# Altium PCB Backup_Supercap.PcbDoc
Units mil, origin at the board's own origin, x right, y up, seen from the top; angles counter-clockwise.
Board outline 2559.06 x 3740.16 mil, 2 copper layers (Top Layer, Bottom Layer); 49 components, 24 nets, 131 pads, 36 vias.
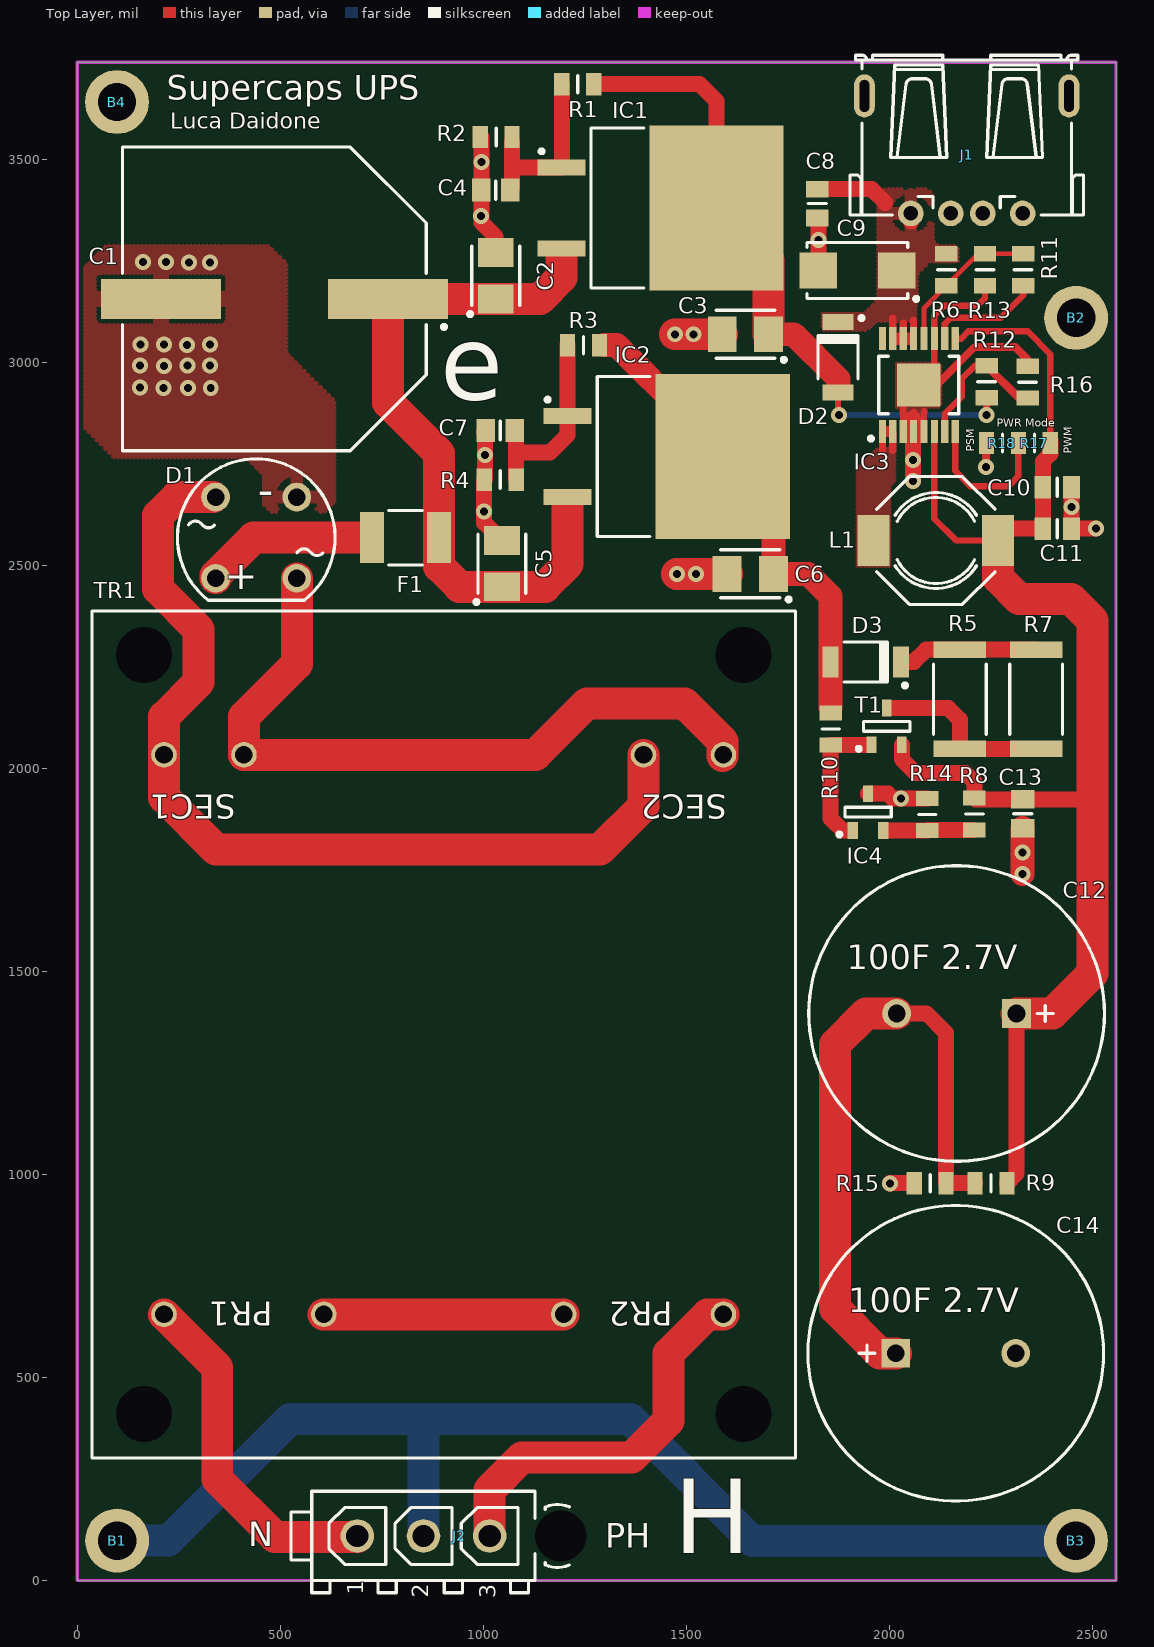
[diagram p0: Top Layer view]
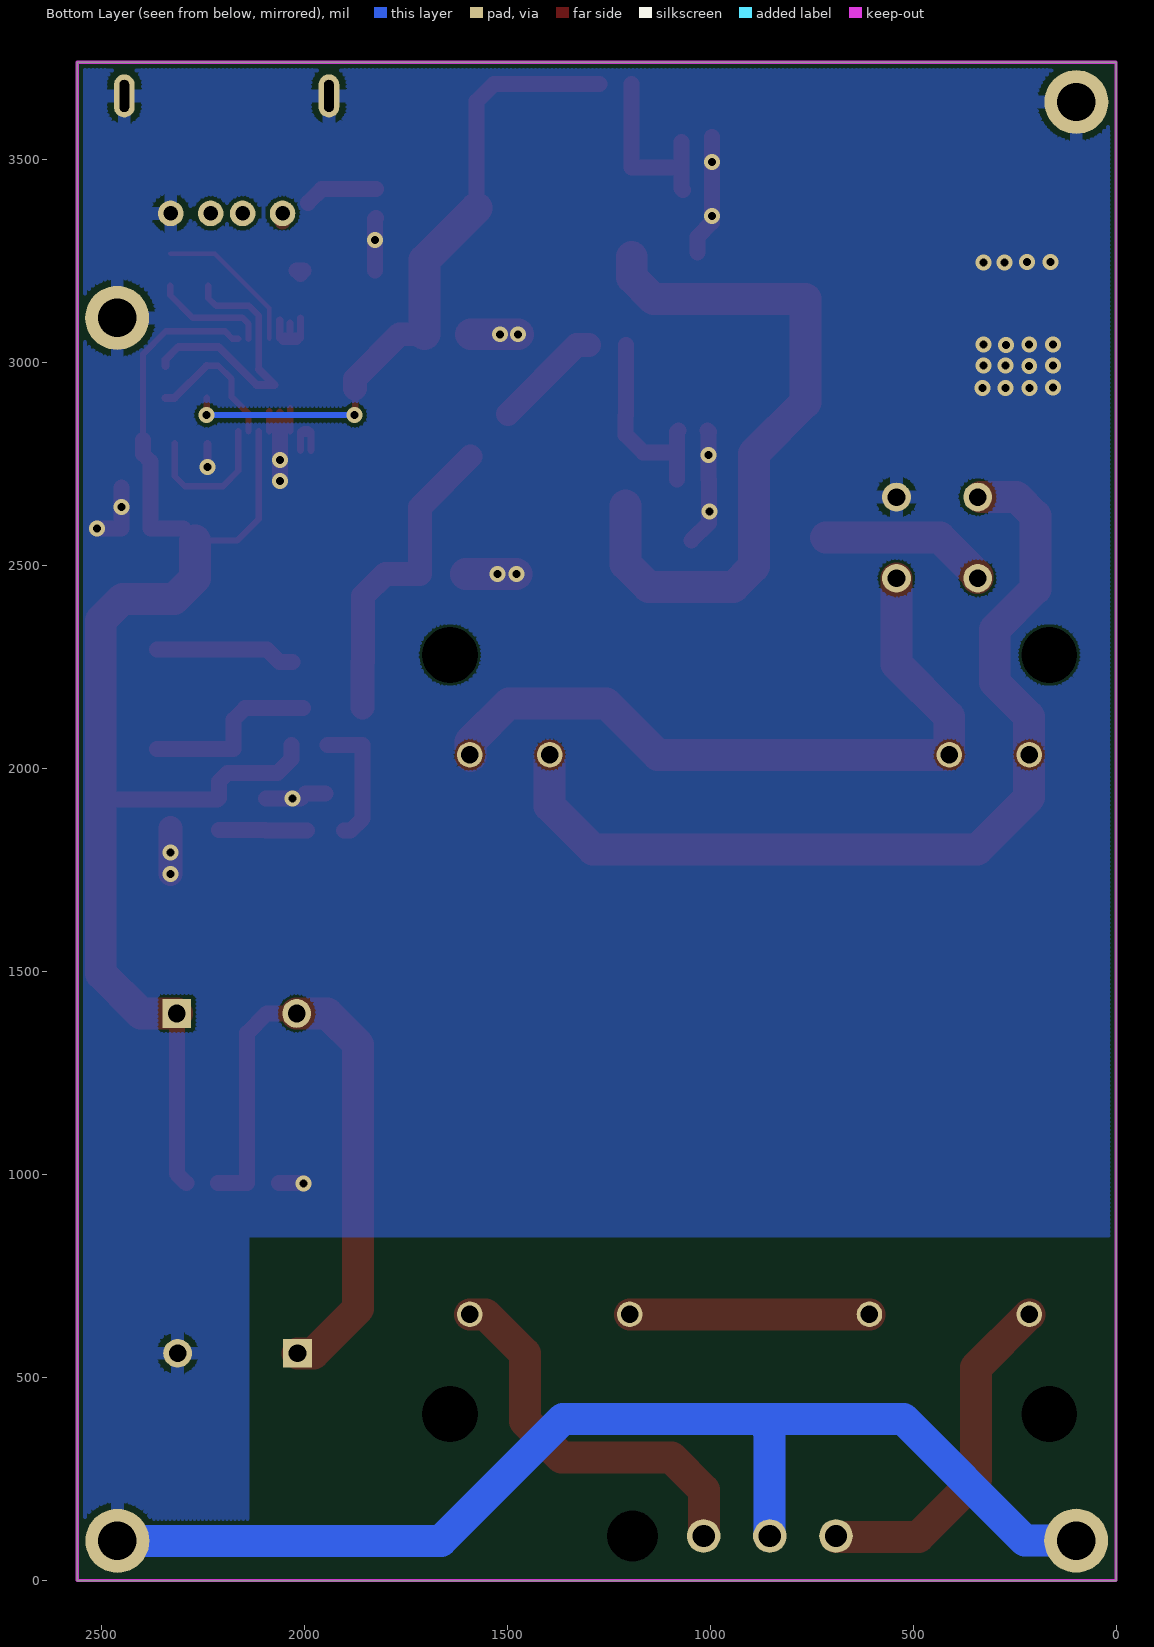
[diagram p1: Bottom Layer view, seen from below]
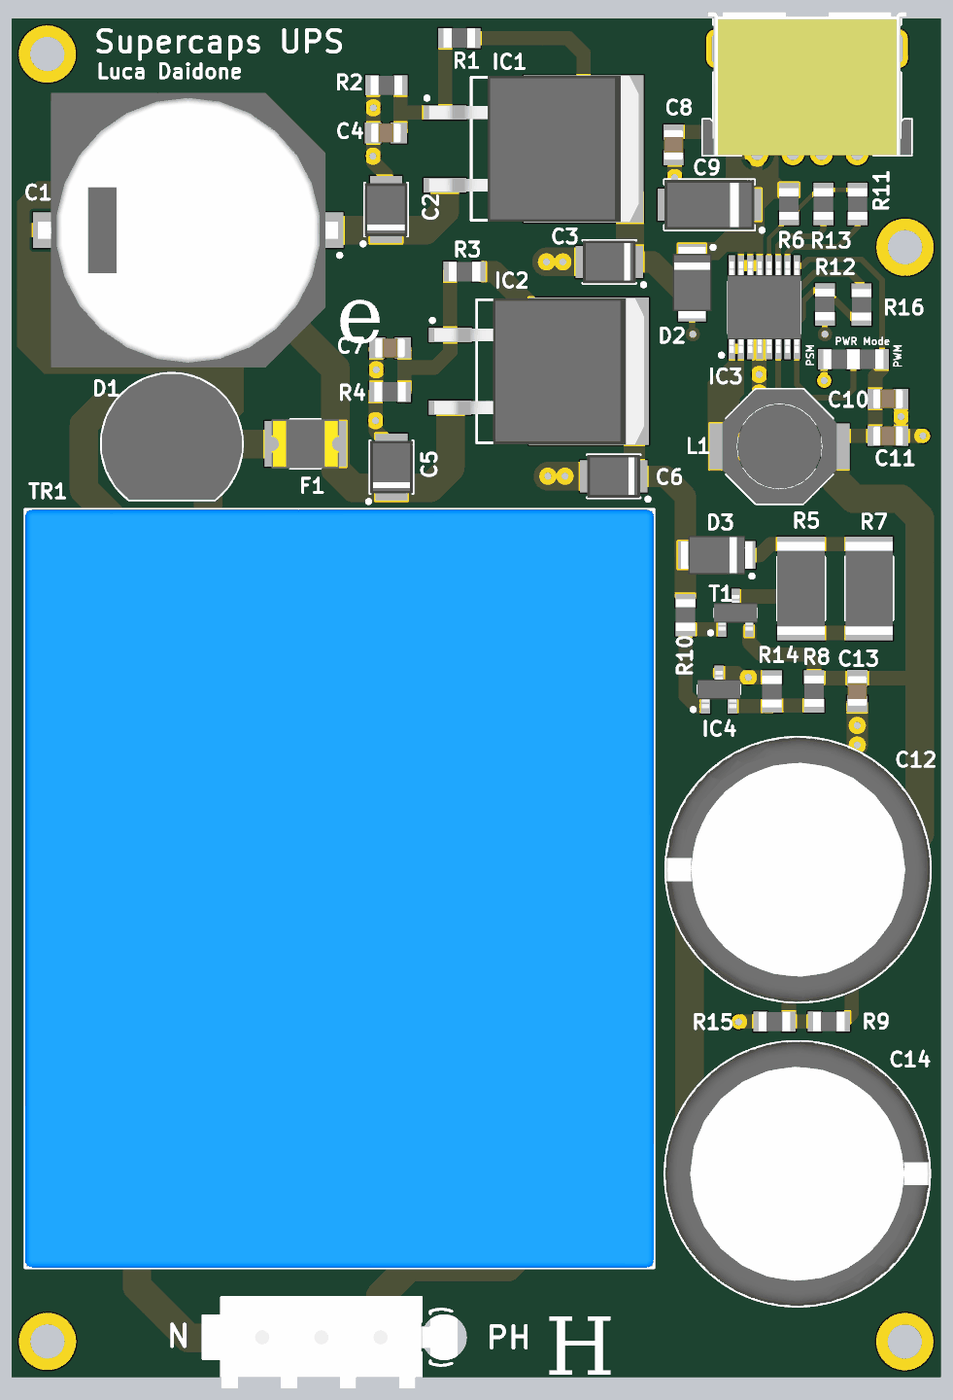
[diagram p2: 3D render of the assembled board from above, using the file's embedded part models]

## Layer stack, top to bottom
Top Solder: solder mask 0.4, Solder Resist, Dk 3.5
Top Layer: signal copper 1.4
Dielectric 1: dielectric 12.6, FR-4, Dk 4.8
Bottom Layer: signal copper 1.4
Bottom Solder: solder mask 0.4, Solder Resist, Dk 3.5

## Board outline
0,0 0,3740.16 2559.06,3740.16 2559.06,0

## Design rules (kind name [scope] priority, off if disabled: settings)
Clearance Clearance_1 [isPad and InComponent('TR1') + isPad and InComponent('J2')] p1: gap=10 ignorepadtopadclearanceinfootprint=FALSE except(0: Arc-Hole Track-Hole SMDPad-Hole THPad-Hole Via-Hole Fill-Hole Poly-Hole Region-Hole Text-Hole; 6: Arc-SMDPad Track-SMDPad SMDPad-SMDPad THPad-Fill THPad-Poly THPad-Region Fill-Fill Fill-Poly Fill-Region Poly-Poly Poly-Region Region-Region)
Clearance [All] p2: gap=10 ignorepadtopadclearanceinfootprint=FALSE except(0: Arc-Hole Track-Hole SMDPad-Hole THPad-Hole Via-Hole Fill-Hole Poly-Hole Region-Hole Text-Hole; 6: Arc-Arc Arc-Track Arc-SMDPad Track-Track Track-SMDPad SMDPad-SMDPad SMDPad-Fill SMDPad-Poly SMDPad-Region Fill-Fill Fill-Poly Fill-Region Poly-Poly Poly-Region Region-Region)
ComponentClearance [All] p1: gap=0 collisioncheckmode=3 verticalgap=100000 showdistances=FALSE
Height [All] p1: minheight=0 maxheight=39370.08 prefheight=500
HoleSize [All] p1: absolutevalues=TRUE maxlimit=300 minlimit=1 maxpercent=80.000 minpercent=20.000
MinimumSolderMaskSliver [All] p1: minsoldermaskwidth=3
PolygonConnect Vias [InComponent('C1') and IsPad] p1: thpad.connectstyle=Relief thpad.reliefconductorwidth=31.5 thpad.reliefentries=4 thpad.polygonreliefangle="90 Angle" thpad.airgapwidth=15.75 smdpad.connectstyle=Relief smdpad.reliefconductorwidth=39.37 smdpad.reliefentries=4 smdpad.polygonreliefangle="90 Angle" smdpad.airgapwidth=10 via.connectstyle=Direct via.reliefconductorwidth=10 via.reliefentries=4 via.polygonreliefangle="90 Angle" via.airgapwidth=10
PolygonConnect [All] p2: thpad.connectstyle=Relief thpad.reliefconductorwidth=31.5 thpad.reliefentries=4 thpad.polygonreliefangle="90 Angle" thpad.airgapwidth=15.75 smdpad.connectstyle=Direct smdpad.reliefconductorwidth=31.5 smdpad.reliefentries=4 smdpad.polygonreliefangle="90 Angle" smdpad.airgapwidth=15.75 via.connectstyle=Direct via.reliefconductorwidth=31.5 via.reliefentries=4 via.polygonreliefangle="90 Angle" via.airgapwidth=15.75
RoutingVias [All] p1: holewidth=19.68 width=39.37 viastyle="Through Hole" minholewidth=13.78 minwidth=19.68 maxholewidth=28 maxwidth=50
SilkToSilkClearance [All] p1: silktosilkclearance=2
SilkToSolderMaskClearance [IsPad] p1: minsilkscreentomaskgap=5 clearancetoexposedcopper=TRUE
SolderMaskExpansion [All] p1: expansion=4
Width [All] p1: maxlimit=393.7 minlimit=10 preferedwidth=59.06
24 further rules are at their usual default settings.

## Components (designator, comment, footprint, x,y, rotation, side; value= is the part's Value field where it differs from the comment)
B1 "Plated Hole" MTG240_400 98.43,98.43 r0 top
B2 "Plated Hole" MTG240_400 2460.63,3110.24 r0 top
B3 "Plated Hole" MTG240_400 2460,98 r0 top
B4 "Plated Hole" MTG240_400 98,3642 r0 top
C1 "4700uF" CAPAE1900X1680N 486,3157 r180 top
C2 "1uF" CAPMP3528X210N 1031,3214 r90 top
C3 "1uF" CAPMP3528X210N 1646,3070 r180 top
C4 "100nF" CAPC2012X88N 1031,3425 r0 top
C5 "1uF" CAPMP3528X210N 1046,2505 r90 top
C6 "1uF" CAPMP3528X210N 1658,2480 r180 top
C7 "100nF" CAPC2012X88N 1042,2833 r0 top
C8 "4.7uF" CAPC2012X135N 1823,3392 r90 top
C9 "150uF" CAPMP6032X280N 1922,3227 r180 top
C10 "10uF" CAPC2012X135N 2414,2693 r180 top
C11 "1uF" CAPC2012X135N 2414,2591 r180 top
C12 "100F" CAPPR750-1850X4650 2166,1397 r180 top
C13 "2.2uF" CAPC2012X140N 2329,1889 r90 top
C14 "100F" CAPPR750-1850X4650 2164,560 r0 top
D1 "W005G-E4/51" VISHAY_WOG 441,2569 r180 top
D2 "PMEG3030EP" SODFL4725X110N 1874,3013 r270 top
D3 "PMEG3030EP" SODFL4725X110N 1942.01,2263 r180 top
F1 "1.1A-16V" FUSR_BOURNS_MF-MSMF_STYLE1(H85) 809,2569 r0 top
IC1 "LM317D2TG" TO254P1420X457-3N-R795X1023 1437.2,3381 r0 top
IC2 "LM317D2TG" TO254P1420X457-3N-R795X1023 1452.2,2769 r0 top
IC3 "TPS61030" SOP65P640X110-17N-S274 2073,2945 r90 top
IC4 "TL431BQDBZ" SOT95P250X110-3N 1948,1893 r90 top
J1 "USB 2.0" "WURTH_614 104 150 121" 2190.97,3367.63 r180 top
J2 "MATE-N-LOK" TYCO_1-770170-1 853,110 r0 top
L1 "6.8uH" IND_BOURNS_SRU8043 2115,2562 r180 top
R1 "2k" RESC2012X60N 1233,3686 r0 top
R2 "649" RESC2012X60N 1032,3556 r0 top
R3 "100" RESC2012X60N 1247,3043 r0 top
R4 "464" RESC2012X60N 1042,2712 r0 top
R5 "33" RESC6331X70N 2174,2171 r270 top
R6 "1M" RESC2012X60N 2141,3229 r90 top
R7 "33" RESC6331X70N 2362,2171 r270 top
R8 "100k" RESC2012X60N 2210,1888 r90 top
R9 "4k7" RESC2012X60N 2251,979 r0 top
R10 "1k2" RESC2012X60N 1856,2098 r270 top
R11 "1M" RESC2012X60N 2330,3229 r90 top
R12 "909k" RESC2012X60N 2240,2953 r90 top
R13 "124k" RESC2012X60N 2236,3229 r90 top
R14 "100k" RESC2012X60N 2094,1887 r270 top
R15 "4k7" RESC2012X60N 2101,979 r0 top
R16 "100k" RESC2012X60N 2341,2952 r270 top
R17 "0" RESC2012X60N 2357.63,2802 r180 top
R18 "0" RESC2012X60N 2279,2802 r180 top
T1 "IRLML0060TRPBF" SOT95P237X112-3N 1994,2104 r90 top
TR1 "2x115V to 2x9V" XFMR_BLOCK_FL6 902.87,1345.02 r90 top

## Footprints (in the part's own frame and the unit in brackets; to place one, negate y for a bottom-side part, rotate by r counter-clockwise, add the part's x,y. Pads: shape width x height; smd on the part's side, far side on the other; paste and mask are expansions set on the pad)
CAPAE1900X1680N [mm] "Capacitor,Aluminum Electrolytic; 19.00mm L X 19.00mm W X 16.80mm H , IPC Medium Density"
  rect 7.5x2.5 smd: 1(-7.1,0) 2(7.1,0)
  silkscreen extent -10.73,-9.5 9.5,9.5, body extent -10.5,-9.6 10.5,9.6, height 16.8
CAPC2012X88N [mm] "Chip Capacitor, Body 2.0x1.25mm, IPC Medium Density"
  rect 1.15x1.45 smd: 1(-0.9,0) 2(0.9,0)
  silkscreen extent 0,-0.58 0,0.58, body extent -1.05,-0.67 1.05,0.68, height 0.9
CAPC2012X135N [mm] "Chip Capacitor, Body 2.0x1.25mm, IPC Medium Density"
  rect 1.05x1.4 smd: 1(-0.9,0) 2(0.9,0)
  silkscreen extent 0,-0.58 0,0.58, body extent -1.05,-0.67 1.05,0.68, height 1.25
CAPC2012X140N [mm] "Chip Capacitor, Body 2.0x1.25mm, IPC Medium Density"
  rect 1.15x1.45 smd: 1(-0.9,0) 2(0.9,0)
  silkscreen extent 0,-0.58 0,0.58, body extent -1.05,-0.67 1.05,0.68, height 1.3
CAPMP3528X210N [mm] "Capacitor, Polarized, Molded  Body 3.5x2.8mm, IPC Medium Density"
  rect 1.8x2.25 smd: 1(-1.45,0) 2(1.45,0)
  silkscreen extent -2.52,-1.5 1.85,1.72, body extent -1.85,-1.5 1.85,1.5, height 2.1
CAPMP6032X280N [mm] "Capacitor, Polarized, Molded  Body 6.0x3.2mm, IPC Medium Density"
  rect 2.35x2.25 smd: 1(-2.45,0) 2(2.45,0)
  silkscreen extent -3.8,-1.75 3.15,1.9, body extent -3.15,-1.75 3.15,1.75, height 2.8
CAPPR750-1850X4650 [mm] "Capacitor, Radial, Pin spacing 7.5mm - Body Diameter 18mm X Body  Height 45mm"
  rect 1.8x1.8 hole 1.1: 1(-3.75,0)
  round 1.8 hole 1.1: 2(3.75,0)
  silkscreen extent -9.25,-9.25 9.25,9.25, body extent -9.25,-9.25 9.25,9.25, height 46.5
FUSR_BOURNS_MF-MSMF_STYLE1(H85) [mm] "PTC Resettable Fuse, MF-MSMS Series, Case Style 1 Height 0.85mm"
  rect 1.5x3.2 smd: 1(-2.1,0) 2(2.1,0)
  silkscreen extent -1.05,-1.71 1.05,1.71, body extent -2.36,-1.71 2.36,1.71, height 0.85
IND_BOURNS_SRU8043 [mm] "SMD Inductor Body Width 8.3mm Body Lenght 8.3mm Height 4.6mm"
  rect 2x3.2 smd: 1(-3.9,0) 2(3.9,0)
  silkscreen extent -3.71,-4 3.71,4, body extent -4,-4 4,4, height 4.3
MTG240_400 [mm] "Plated Through Hole: Hole Dia.=2.4mm Pad Dia.=4.0mm"
  round 4 hole 2.4: 1(0,0)
RESC2012X60N [mm] "Chip Resistor, EIA 0805, Metric 2012, Body 2.0x1.2mm, IPC Medium Density"
  rect 0.95x1.4 smd: 1(-1,0) 2(1,0)
  silkscreen extent 0,-0.55 0,0.55, body extent -1.1,-0.67 1.1,0.68, height 0.6
RESC6331X70N [mm] "Chip Resistor, EIA 2512, Metric 6331, 2-Leads, Body 6.3x3.1mm, IPC Medium Density"
  rect 1.05x3.3 smd: 1(-3.1,0) 2(3.1,0)
  silkscreen extent -2.2,-1.65 2.2,1.65, body extent -3.25,-1.65 3.25,1.65, height 0.7
SODFL4725X110N [mm] "SOD128, SODFL Diode; 3.80mm W X 2.50mm L X 1.10mm H Body, IPC Medium Density"
  rect 1x1.93 smd: 1(-2.21,0) 2(2.21,0)
  silkscreen extent -2.58,-1.25 1.35,1.6, body extent -2.5,-1.35 2.5,1.35, height 1.1
SOP65P640X110-17N-S274 [mm] "SOP, 0.65mm Pitch; 16 Pin, 4.40mm W X 5.00mm L X 1.10mm H body (w/thermal tab 2.74mm X 2.74mm), IPC Medium Density"
  rect 1.45x0.45 smd: 1(-2.9,2.275) 2(-2.9,1.625) 3(-2.9,0.975) 4(-2.9,0.325) 5(-2.9,-0.325) 6(-2.9,-0.975) 7(-2.9,-1.625) 8(-2.9,-2.275) 9(2.9,-2.275) 10(2.9,-1.625) 11(2.9,-0.975) 12(2.9,-0.325) 13(2.9,0.325) 14(2.9,0.975) 15(2.9,1.625) 16(2.9,2.275)
  rect 2.7x2.7 smd: 17(0,0)
  silkscreen extent -3.47,-2.5 1.8,3.12, body extent -3.2,-2.55 3.2,2.55, height 1.1
SOT95P237X112-3N [mm] "SOT, 0.95mm, pitch; 3 pin,1.30mm W X 2.92mm L X 1.12mm H body, IPC Medium Density"
  rect 1.05x0.6 smd: 1(-1.15,0.95) 2(-1.15,-0.95) 3(1.15,0)
  silkscreen extent -1.52,-1.45 0.3,1.87, body extent -1.25,-1.5 1.25,1.5, height 1.1
SOT95P250X110-3N [mm] "SOT23 3-Leads, Pitch 0.95mm - Body 1.3x2.9mm, IPC Medium Density"
  rect 1.05x0.65 smd: 1(-1.15,0.95) 2(-1.15,-0.95) 3(1.15,0)
  silkscreen extent -1.52,-1.45 0.3,1.92, body extent -1.3,-1.5 1.3,1.5, height 1.1
TO254P1420X457-3N-R795X1023 [mm] "D2PAK TO-263, TO, 2.54mm pitch; 3 pin, 14.199mm L X 9.195mm W X 4.57mm H body, IPC Medium Density"
  rect 3x1 smd: 1(-6.2,2.54) 2(-6.2,-2.54)
  rect 8.4x10.3 smd: 3(3.5,0)
  silkscreen extent -7.57,-5 -1.05,5, body extent -7.36,-5.1 7.36,5.1, height 4.57
TYCO_1-770170-1 [mm] "3 Circuits In-Line - Mini-Universal MATE-N-LOK Connector"
  round 2.1 hole 1.4: 1(-4.14,0) 2(0,0) 3(4.14,0)
  round 0.5 hole 3.2 unplated mask+1.35: 4(8.59,0)
  silkscreen extent -8.28,-3.56 9.12,2.79, body extent -8.28,-3.56 9.53,2.79, height 14.25
VISHAY_WOG [mm] "Bridge Rectifier, Body 9.35m x 8.33mm, VISHAY Case Type WOG"
  round 1.8 hole 1.1: 1(2.54,2.54) 2(2.54,-2.54) 3(-2.54,-2.54) 4(-2.54,2.54)
  silkscreen extent -4.93,-4.93 4.93,3.91, body extent -4.93,-4.93 4.93,3.91, height 13.5
"WURTH_614 104 150 121" [mm] "Horizontal USB2.0 A Type Receptacle, SLIM Type, 4 Contacts"
  round 1.6 hole 0.9: 1(3.5,0) 2(1,0) 3(-1,0) 4(-3.5,0)
  oval 1.3x2.7 hole 0.6 slot 2 at 90 deg: 5(-6.4,-7.35) 5(6.4,-7.35)
  silkscreen extent -7.3,-9.9 7.3,0.1, body extent -7.3,-9.9 7.3,0.1, height 7.22
XFMR_BLOCK_FL6 [mm] "BLOCK TRANSFORMATOREN Serie FL, Body 53mm x 44mm"
  round 1.6 hole 1.1: 1(-17.5,17.5) 2(-17.5,7.5) 3(-17.5,-7.5) 4(-17.5,-17.5) 5(17.5,-17.5) 6(17.5,-12.5) 7(17.5,12.5) 8(17.5,17.5)
  round 0.5 hole 3.5 unplated mask+1.5: 9(23.75,18.75) 10(23.75,-18.75) 11(-23.75,-18.75) 12(-23.75,18.75)
  silkscreen extent -26.5,-22 26.5,22, body extent -26.5,-22 26.5,22, height 22.7

## Part data
B1 B2 B3 B4: library part PLATED_HOLE2.4_PAD4.0, "Single Terminal Socket", Author="CERN DEM JMW", ComponentHeight=0mm, Component Type="Standard (No BOM)", CreateDate=10/10/2011, Family="Plated Hole", HelpURL=Undefined, LatestRevisionDate=10/10/2011, Mounted=No, PackageDescription="Plated Through Hole: Hole Dia.=2.4mm Pad Dia.=4.0mm", Part Description="Plated Through Hole: Hole Dia.=2.4mm Pad Dia.=4.0mm", Part Number=PLATED_HOLE2.4_PAD4.0, Pin Count=1, Sense=No, SMD=No, Socket=No, Status=None
C1: library part CAE1900-1680_4700UF_16V_20%, "Polarised capacitor", Case=K16, Manufacturer=PANASONIC, Manufacturer Part Number=EEVFK1C472M, Tolerance=±20%, Voltage=16V, Author="CERN DEM JLC", ComponentHeight=16.8mm, Component Type=Standard, CreateDate=05/11/2014, HelpURL=\\cern.ch\dfs\Applications\Altium\Datasheets\CAE_PANASONIC_FK.pdf, LatestRevisionDate=05/11/2014, Mounted=Yes, Part Description="Aluminum Electrolytic SMT Capacitor", Part Number=CAE1900-1680_4700UF_16V_20%, Pin Count=2, Sense=No, SMD=Yes, Socket=No, Status="Not Recommended"
C2 C3 C5 C6: library part CTE3528-21_1UF_35V_10%_LESR2000, "Polarised capacitor", Case=B, Manufacturer=GENERIC, Manufacturer1 ComponentHeight=2.1mm, Manufacturer1 Example=AVX, Manufacturer1 Part Number=TPSB105K035R2000, Tolerance=±10%, Voltage=35V, Author="CERN DEM MR", Component Type=Standard, CreateDate=04/10/2016, HelpURL=\\cern.ch\dfs\Applications\Altium\Datasheets\CTE-LESR_AVX_TPS.pdf, LatestRevisionDate=04/10/2016, Manufacturer Part Number=CTE3528-21_1UF_35V_10%_LESR2000, Mounted=Yes, Part Description="Low ESR 2R Solid Tantalum Chip Capacitor", Part Number=CTE3528-21_1UF_35V_10%_LESR2000, Pin Count=2, Sense=No, SMD=Yes, Socket=No, Status=Preferred
C4 C7: library part CC0805_100NF_50V_10%_X7R_YUDEN_UMK212B7104KGHT, "Non-polarised capacitor", Case=0805, Manufacturer="TAIYO YUDEN", Manufacturer Part Number=UMK212B7104KGHT, Tolerance=±10%, Voltage=50V, Author="CERN DEM JLC", ComponentHeight=1.35mm, Component Type=Standard, CreateDate=23/04/2015, HelpURL=\\cern.ch\dfs\Applications\Altium\Datasheets\CC0805_TAIYO-YUDEN_UMK212B7104KGHT.pdf, LatestRevisionDate=23/04/2015, Mounted=Yes, Part Description="SMD Multilayer Chip Ceramic Capacitor (High Dielectric Type) for Automotive / Industrial Applications", Part Number=CC0805_100NF_50V_10%_X7R_YUDEN_UMK212B7104KGHT, Pin Count=2, Sense=No, SMD=Yes, Socket=No, Status="Not Recommended", TC=X7R
C8: library part CC0805_4.7UF_10V_10%_X5R, "Non-polarised capacitor", Case=0805, Manufacturer=GENERIC, Manufacturer1 ComponentHeight=1.45mm, Manufacturer1 Example=PHYCOMP, Manufacturer1 Part Number=222224013672, Tolerance=±10%, Voltage=10V, Author="CERN DEM JLC", Component Type=Standard, CreateDate=03/12/2007, HelpURL=\\cern.ch\dfs\Applications\Altium\Datasheets\CC0805_X5R_PHYCOMP_HC.pdf, LatestRevisionDate=03/12/2007, Manufacturer Part Number=CC0805_4.7UF_10V_10%_X5R, Mounted=Yes, Part Description="SMD Multilayer Chip Ceramic Capacitor", Part Number=CC0805_4.7UF_10V_10%_X5R, Pin Count=2, Sense=No, SMD=Yes, Socket=No, Status=Preferred, TC=X5R
C9: library part CTE6032-28_150UF_10V_10%, "Polarised capacitor", Case=C, Manufacturer=GENERIC, Manufacturer1 ComponentHeight=2.8mm, Manufacturer1 Example=AVX, Manufacturer1 Part Number=TAJC157K010R, Tolerance=±10%, Voltage=10V, Author="CERN DEM JLC", Component Type=Standard, CreateDate=03/12/2007, HelpURL=\\cern.ch\dfs\Applications\Altium\Datasheets\CTE_AVX_TAJ.pdf, LatestRevisionDate=03/12/2007, Manufacturer Part Number=CTE6032-28_150UF_10V_10%, Mounted=Yes, Part Description="Solid Tantalum Chip Capacitor", Part Number=CTE6032-28_150UF_10V_10%, Pin Count=2, Sense=No, SMD=Yes, Socket=No, Status=Preferred
C10: library part CC0805_10UF_16V_10%_X5R, "Non-polarised capacitor", Case=0805, Manufacturer=GENERIC, Manufacturer1 ComponentHeight=1.4mm, Manufacturer1 Example=KEMET, Manufacturer1 Part Number=C0805C106K4PAC, Tolerance=±10%, Voltage=16V, Author="CERN DEM JLC", Component Type=Standard, CreateDate=03/12/2007, HelpURL=\\cern.ch\dfs\Applications\Altium\Datasheets\CC1206_X5R_KEMET.pdf, LatestRevisionDate=03/12/2007, Manufacturer Part Number=CC0805_10UF_16V_10%_X5R, Mounted=Yes, Part Description="SMD Multilayer Chip Ceramic Capacitor", Part Number=CC0805_10UF_16V_10%_X5R, Pin Count=2, Sense=No, SMD=Yes, Socket=No, Status=Preferred, TC=X5R
C11: library part CC0805_1UF_16V_10%_X7R, "Non-polarised capacitor", Case=0805, Manufacturer=GENERIC, Manufacturer1 ComponentHeight=1.45mm, Manufacturer1 Example=TDK, Manufacturer1 Part Number=C2012X7R1C105K125AA, Tolerance=±10%, Voltage=16V, Author="CERN DEM JLC", Component Type=Standard, CreateDate=03/12/2007, HelpURL=\\cern.ch\dfs\Applications\Altium\Datasheets\CC0805_X7R_TDK_C.pdf, LatestRevisionDate=22/04/2015, Manufacturer Part Number=CC0805_1UF_16V_10%_X7R, Mounted=Yes, Part Description="SMD Multilayer Chip Ceramic Capacitor", Part Number=CC0805_1UF_16V_10%_X7R, Pin Count=2, Sense=No, SMD=Yes, Socket=No, Status=Preferred, TC=X7R
C12 C14: library part "100F SuperCapacitor", "EECHL0E107"
C13: library part CC0805_2.2UF_16V_10%_X7R_KEMET_C0805C225K4RACAUTO, "Non-polarised capacitor", Case=0805, Manufacturer=KEMET, Manufacturer Part Number=C0805C225K4RACAUTO, Tolerance=±10%, Voltage=16V, Author="CERN DEM MR", ComponentHeight=1.4mm, Component Type=Standard, CreateDate=01/10/2018, HelpURL=\\cern.ch\dfs\Applications\Altium\Datasheets\CC0805_KEMET_C0805C225K4RACAUTO.pdf, LatestRevisionDate=01/10/2018, Mounted=Yes, Part Description="SMD Multilayer Chip Ceramic Capacitor (Automotive Grade)", Part Number=CC0805_2.2UF_16V_10%_X7R_KEMET_C0805C225K4RACAUTO, Pin Count=2, Sense=No, SMD=Yes, Socket=No, Status="Not Recommended", TC=X7R
D1: "Bridge Rectifier 1+ 2AC 3- 4AC", Manufacturer="VISHAY GENERAL SEMICONDUCTOR", Power=1.5A, Voltage=50V, Author="CERN DEM JLC", Bonding=No, ComponentHeight=13.5mm, Component Type=Standard, CreateDate=20/09/2011, Device=W005G-E4/51, HelpURL=\\cern.ch\dfs\Applications\Altium\Datasheets\W005G-E4-51.pdf, LatestRevisionDate=08/04/2016, Manufacturer Part Number=W005G-E4/51, Mounted=Yes, PackageDescription="Bridge Rectifier, Body 9.35m x 8.33mm, VISHAY Case Type WOG", Part Description="Glass Passivated Single-Phase Bridge Rectifier", Part Number=W005G-E4/51, Pin Count=4, PressFit=No, Sense=No, SMD=No, Socket=No
D2 D3: "Schottky Diode", Case=SOD128, Manufacturer=NEXPERIA, Power=3A, Voltage=30V, Author="CERN DEM JLC", Bonding=No, ComponentHeight=1.1mm, Component Type=Standard, CreateDate=17/09/2018, Device=PMEG3030EP, HelpURL=\\cern.ch\dfs\Applications\Altium\Datasheets\PMEG3030EP.pdf, LatestRevisionDate=17/09/2018, Manufacturer Part Number=PMEG3030EP, Mounted=Yes, PackageDescription="SOD128, SODFL Diode; 3.80mm W X 2.50mm L X 1.10mm H Body, IPC Medium Density", Part Description="Low VF MEGA Schottky Barrier Rectifier", Part Number=PMEG3030EP, Pin Count=2, PressFit=No, Sense=No, SMD=Yes, Socket=No
F1: library part FUSR_BOURNS_MF-MSMF110/16-2, "Fuse", Manufacturer=BOURNS, Manufacturer Part Number=MF-MSMF110/16-2, Author="CERN DEM JLC", ComponentHeight=0.85mm, Component Type=Standard, CreateDate=02/03/2011, Family="Fuses Resettable", HelpURL=\\cern.ch\dfs\Applications\Altium\Datasheets\FUSR_BOURNS_MF-MSMF.pdf, LatestRevisionDate=29/11/2012, Mounted=Yes, PackageDescription="PTC Resettable Fuse, MF-MSMS Series, Case Style 1 Height 0.85mm", Part Description="PTC Resettable Fuse", Part Number=FUSR_BOURNS_MF-MSMF110/16-2, Pin Count=2, PressFit=No, Sense=No, SMD=Yes, Socket=No
IC1 IC2: "3-Terminal Regulator 1=Adj 2=IN 3=OUT", Case=D2PAK, Manufacturer="ON SEMICONDUCTOR", Author="CERN DEM JLC", Bonding=No, ComponentHeight=4.57mm, Component Type=Standard, CreateDate=19/05/2010, Device=LM317D2TG, HelpURL=\\cern.ch\dfs\Applications\Altium\Datasheets\LM317D2TG.pdf, LatestRevisionDate=19/05/2010, Manufacturer Part Number=LM317D2TG, Mounted=Yes, PackageDescription="D2PAK TO-263, TO, 2.54mm pitch; 3 pin, 14.199mm L X 9.195mm W X 4.57mm H body, IPC Medium Density", Part Description="1.2V To 37V, 1.5A Adjustable Positive Voltage Regulator", Part Number=LM317D2TG, Pin Count=3, PressFit=No, Sense=No, SMD=Yes, Socket=No
IC3: "Boost converter"
IC4: "Precision Reference 1=Cathode 2=Adj 3=Anode", Case=SOT23, Manufacturer="NXP SEMICONDUCTORS", Author="CERN DEM MR", Bonding=No, ComponentHeight=1.1mm, Component Type=Standard, CreateDate=18/04/2016, Device=TL431BQDBZ, HelpURL=\\cern.ch\dfs\Applications\Altium\Datasheets\TL431BQDBZ.pdf, LatestRevisionDate=18/04/2016, Manufacturer Part Number=TL431BQDBZ, Mounted=Yes, PackageDescription="SOT23, 0.95mm Pitch; 3 Pin, 1.3mm W X 2.9mm L X 1.1mm H Body, IPC Medium Density", Part Description="Vref (2.495V) To 36V 0.5% Precision Programmable Reference", Part Number=TL431BQDBZ, Pin Count=3, PressFit=No, Sense=No, SMD=Yes, Socket=No
J1: library part "WURTH_614 104 150 121", "4 Pin + 1 Shield USB Receptacle", Manufacturer="WURTH ELEKTRONIK", Manufacturer Part Number="614 104 150 121", Author="CERN DEM JMW", ComponentHeight=7.2mm, Component Type=Standard, CreateDate=07/07/2015, Family="USB 2.0", HelpURL="\\cern.ch\dfs\Applications\Altium\Datasheets\WURTH_614 104 150 121.pdf", LatestRevisionDate=07/07/2015, Mounted=Yes, Part Description="USB 2.0 Type A Receptacle, Right Angle, SLIM Type, 4 Contacts", Part Number="WURTH_614 104 150 121", Pin Count=5, PressFit=No, Sense=No, SMD=No, Socket=No, Status=None
J2: library part TYCO_1-770170-1, "Connector 3 Male", Manufacturer="TYCO ELECTRONICS", Manufacturer Part Number=1-770170-1, Author="CERN DEM JLC", ComponentHeight=14.25mm, Component Type=Standard, CreateDate=26/05/2011, Family=MATE-N-LOK, HelpURL=\\cern.ch\dfs\Applications\Altium\Datasheets\TYCO_1-770170-1.pdf, LatestRevisionDate=26/05/2011, Mounted=Yes, Part Description="3 Circuits In-Line, Mini-Universal MATE-N-LOK Connector", Part Number=TYCO_1-770170-1, Pin Count=3, PressFit=No, Sense=No, SMD=No, Socket=No, Status=None
L1: library part IND_6.8UH_30%_BOURNS_SRU8043, "Inductor", Manufacturer=BOURNS, Manufacturer Part Number=SRU8043-6R8Y, Power=3.8A, Resistance=0.0224R, Tolerance=±30%, Author="CERN DEM JMW", ComponentHeight=4.6mm, Component Type=Standard, CreateDate=06/08/2015, HelpURL=\\cern.ch\dfs\Applications\Altium\Datasheets\IND_BOURNS_SRU8043.pdf, LatestRevisionDate=06/08/2015, Mounted=Yes, Part Description="Shielded SMD Power Inductor", Part Number=IND_6.8UH_30%_BOURNS_SRU8043, Pin Count=2, Sense=No, SMD=Yes, Socket=No, Status=None
R1: library part R0805_2K_0.1%_0.1W_10PPM, "Resistor - 0.1%", Case=0805, Manufacturer=GENERIC, Manufacturer1 ComponentHeight=0.6mm, Manufacturer1 Example="TYCO HOLSWORTHY", Manufacturer1 Part Number=RN73C2A2K0BTG, Power=0.1W, Tolerance=±0.1%, Author="CERN DEM JLC", Component Type=Standard, CreateDate=03/12/2007, HelpURL=\\cern.ch\dfs\Applications\Altium\Datasheets\R0805_Tyco_RN73.pdf, LatestRevisionDate=13/03/2008, Manufacturer Part Number=R0805_2K_0.1%_0.1W_10PPM, Mounted=Yes, Part Description="Thin Film Chip Resistor", Part Number=R0805_2K_0.1%_0.1W_10PPM, Pin Count=2, PressFit=No, Sense=No, SMD=Yes, Socket=No, Status="Not Recommended", TC=±10ppm
R2: library part R0805_649R_0.1%_0.1W_10PPM, "Resistor - 0.1%", Case=0805, Manufacturer=GENERIC, Manufacturer1 ComponentHeight=0.6mm, Manufacturer1 Example="TYCO HOLSWORTHY", Manufacturer1 Part Number=RN73C2A649RBTG, Power=0.1W, Tolerance=±0.1%, Author="CERN DEM JLC", Component Type=Standard, CreateDate=03/12/2007, HelpURL=\\cern.ch\dfs\Applications\Altium\Datasheets\R0805_Tyco_RN73.pdf, LatestRevisionDate=13/03/2008, Manufacturer Part Number=R0805_649R_0.1%_0.1W_10PPM, Mounted=Yes, Part Description="Thin Film Chip Resistor", Part Number=R0805_649R_0.1%_0.1W_10PPM, Pin Count=2, PressFit=No, Sense=No, SMD=Yes, Socket=No, Status="Not Recommended", TC=±10ppm
R3: library part R0805_100R_0.1%_0.1W_10PPM, "Resistor - 0.1%", Case=0805, Manufacturer=GENERIC, Manufacturer1 ComponentHeight=0.6mm, Manufacturer1 Example="TYCO HOLSWORTHY", Manufacturer1 Part Number=RN73C2A100RBTG, Power=0.1W, Tolerance=±0.1%, Author="CERN DEM JLC", Component Type=Standard, CreateDate=03/12/2007, HelpURL=\\cern.ch\dfs\Applications\Altium\Datasheets\R0805_Tyco_RN73.pdf, LatestRevisionDate=13/03/2008, Manufacturer Part Number=R0805_100R_0.1%_0.1W_10PPM, Mounted=Yes, Part Description="Thin Film Chip Resistor", Part Number=R0805_100R_0.1%_0.1W_10PPM, Pin Count=2, PressFit=No, Sense=No, SMD=Yes, Socket=No, Status="Not Recommended", TC=±10ppm
R4: library part R0805_464R_0.1%_0.1W_10PPM, "Resistor - 0.1%", Case=0805, Manufacturer=GENERIC, Manufacturer1 ComponentHeight=0.6mm, Manufacturer1 Example="TYCO HOLSWORTHY", Manufacturer1 Part Number=RN73C2A464RBTG, Power=0.1W, Tolerance=±0.1%, Author="CERN DEM JLC", Component Type=Standard, CreateDate=03/12/2007, HelpURL=\\cern.ch\dfs\Applications\Altium\Datasheets\R0805_Tyco_RN73.pdf, LatestRevisionDate=13/03/2008, Manufacturer Part Number=R0805_464R_0.1%_0.1W_10PPM, Mounted=Yes, Part Description="Thin Film Chip Resistor", Part Number=R0805_464R_0.1%_0.1W_10PPM, Pin Count=2, PressFit=No, Sense=No, SMD=Yes, Socket=No, Status="Not Recommended", TC=±10ppm
R5 R7: library part R2512_33R_1%_1W_100PPM, "Resistor - 1%", Case=2512, Manufacturer=GENERIC, Manufacturer1 ComponentHeight=0.65mm, Manufacturer1 Example="YAGEO PHYCOMP", Manufacturer1 Part Number="232276363309L or RC2512FK-0733RL", Power=1W, Tolerance=±1%, Author="CERN DEM JLC", Component Type=Standard, CreateDate=21/07/2008, HelpURL=\\cern.ch\dfs\Applications\Altium\Datasheets\R2512_Phycomp_RC2512.pdf, LatestRevisionDate=17/10/2012, Manufacturer Part Number=R2512_33R_1%_1W_100PPM, Mounted=Yes, Part Description="Thick Film Chip Resistor", Part Number=R2512_33R_1%_1W_100PPM, Pin Count=2, PressFit=No, Sense=No, SMD=Yes, Socket=No, Status=Preferred, TC=±100ppm/°C
R6 R11: library part R0805_1M_0.1%_0.1W_25PPM, "Resistor - 0.1%", Case=0805, Manufacturer=GENERIC, Manufacturer1 ComponentHeight=0.65mm, Manufacturer1 Example="TT ELECTRONICS", Manufacturer1 Part Number=PCF0805R-1M0BT1, Power=0.1W, Tolerance=±0.1%, Author="CERN DEM JLC", Component Type=Standard, CreateDate=17/11/2008, HelpURL="\\cern.ch\dfs\Applications\Altium\Datasheets\R0805_TT ELECTRONICS_PCF.pdf", LatestRevisionDate=25/10/2018, Manufacturer Part Number=R0805_1M_0.1%_0.1W_25PPM, Mounted=Yes, Part Description="Precision Surface Mount Resistor", Part Number=R0805_1M_0.1%_0.1W_25PPM, Pin Count=2, PressFit=No, Sense=No, SMD=Yes, Socket=No, Status="Not Recommended", TC=±25ppm/°C
R8 R14 R16: library part R0805_100K_0.1%_0.1W_10PPM, "Resistor - 0.1%", Case=0805, Manufacturer=GENERIC, Manufacturer1 ComponentHeight=0.6mm, Manufacturer1 Example="TYCO HOLSWORTHY", Manufacturer1 Part Number=RN73C2A100KBTG, Power=0.1W, Tolerance=±0.1%, Author="CERN DEM JLC", Component Type=Standard, CreateDate=03/12/2007, HelpURL=\\cern.ch\dfs\Applications\Altium\Datasheets\R0805_Tyco_RN73.pdf, LatestRevisionDate=13/03/2008, Manufacturer Part Number=R0805_100K_0.1%_0.1W_10PPM, Mounted=Yes, Part Description="Thin Film Chip Resistor", Part Number=R0805_100K_0.1%_0.1W_10PPM, Pin Count=2, PressFit=No, Sense=No, SMD=Yes, Socket=No, Status="Not Recommended", TC=±10ppm
R9 R15: library part R0805_4K7_1%_0.125W_100PPM, "Resistor - 1%", Case=0805, Manufacturer=GENERIC, Manufacturer1 ComponentHeight=0.6mm, Manufacturer1 Example="NIC COMPONENT", Manufacturer1 Part Number=NRC10F4701TRF, Power=0.125W, Tolerance=±1%, Author="CERN DEM JLC", Component Type=Standard, CreateDate=03/12/2007, HelpURL=\\cern.ch\dfs\Applications\Altium\Datasheets\R0805_NIC_NRC.pdf, LatestRevisionDate=13/03/2008, Manufacturer Part Number=R0805_4K7_1%_0.125W_100PPM, Mounted=Yes, Part Description="General Purpose Thick Film Chip Resistor", Part Number=R0805_4K7_1%_0.125W_100PPM, Pin Count=2, PressFit=No, Sense=No, SMD=Yes, Socket=No, Status=Preferred, TC=±100ppm/°C
R10: library part R0805_1K2_1%_0.125W_100PPM, "Resistor - 1%", Case=0805, Manufacturer=GENERIC, Manufacturer1 ComponentHeight=0.6mm, Manufacturer1 Example="NIC COMPONENT", Manufacturer1 Part Number=NRC10F1201TRF, Power=0.125W, Tolerance=±1%, Author="CERN DEM JLC", Component Type=Standard, CreateDate=03/12/2007, HelpURL=\\cern.ch\dfs\Applications\Altium\Datasheets\R0805_NIC_NRC.pdf, LatestRevisionDate=13/03/2008, Manufacturer Part Number=R0805_1K2_1%_0.125W_100PPM, Mounted=Yes, Part Description="General Purpose Thick Film Chip Resistor", Part Number=R0805_1K2_1%_0.125W_100PPM, Pin Count=2, PressFit=No, Sense=No, SMD=Yes, Socket=No, Status=Preferred, TC=±100ppm/°C
R12: library part R0805_909K_0.1%_0.1W_10PPM, "Resistor - 0.1%", Case=0805, Manufacturer=GENERIC, Manufacturer1 ComponentHeight=0.6mm, Manufacturer1 Example="TYCO HOLSWORTHY", Manufacturer1 Part Number=RN73C2A909KBTG, Power=0.1W, Tolerance=±0.1%, Author="CERN DEM MR", Component Type=Standard, CreateDate=12/10/2017, HelpURL=\\cern.ch\dfs\Applications\Altium\Datasheets\R0805_Tyco_RN73.pdf, LatestRevisionDate=12/10/2017, Manufacturer Part Number=R0805_909K_0.1%_0.1W_10PPM, Mounted=Yes, Part Description="Thin Film Chip Resistor", Part Number=R0805_909K_0.1%_0.1W_10PPM, Pin Count=2, PressFit=No, Sense=No, SMD=Yes, Socket=No, Status="Not Recommended", TC=±10ppm
R13: library part R0805_124K_0.1%_0.1W_10PPM, "Resistor - 0.1%", Case=0805, Manufacturer=GENERIC, Manufacturer1 ComponentHeight=0.6mm, Manufacturer1 Example="TYCO HOLSWORTHY", Manufacturer1 Part Number=RN73C2A124KBTG, Power=0.1W, Tolerance=±0.1%, Author="CERN DEM JLC", Component Type=Standard, CreateDate=03/12/2007, HelpURL=\\cern.ch\dfs\Applications\Altium\Datasheets\R0805_Tyco_RN73.pdf, LatestRevisionDate=13/03/2008, Manufacturer Part Number=R0805_124K_0.1%_0.1W_10PPM, Mounted=Yes, Part Description="Thin Film Chip Resistor", Part Number=R0805_124K_0.1%_0.1W_10PPM, Pin Count=2, PressFit=No, Sense=No, SMD=Yes, Socket=No, Status="Not Recommended", TC=±10ppm
R17 R18: library part R0805_0R_JUMPER, "Resistor", Case=0805, Manufacturer=GENERIC, Manufacturer1 ComponentHeight=0.6mm, Manufacturer1 Example="NIC COMPONENT", Manufacturer1 Part Number=NRC10Z0, Author="CERN DEM JLC", Component Type=Standard, CreateDate=03/12/2007, HelpURL=\\cern.ch\dfs\Applications\Altium\Datasheets\R0805_NIC_NRC.pdf, LatestRevisionDate=13/03/2008, Manufacturer Part Number=R0805_0R_JUMPER, Mounted=Yes, Part Description="2A (0.05R Max DC Resistance) Zero Ohm Jumper", Part Number=R0805_0R_JUMPER, Pin Count=2, PressFit=No, Sense=No, SMD=Yes, Socket=No, Status=Preferred
T1: "N-CHANNEL MOSFET WITH DIODE", Case=SOT23-3, Manufacturer="INTERNATIONAL RECTIFIER", Author="CERN DEM JLC", Bonding=No, ComponentHeight=1.12mm, Component Type=Standard, CreateDate=06/10/2011, Device=IRLML0060TRPBF, HelpURL=\\cern.ch\dfs\Applications\Altium\Datasheets\IRLML0060TRPBF.pdf, LatestRevisionDate=06/10/2011, Manufacturer Part Number=IRLML0060TRPBF, Mounted=Yes, PackageDescription="SOT, 0.95mm, pitch; 3 pin,1.30mm W X 2.92mm L X 1.12mm H body, IPC Medium Density", Part Description="60V 2.7A N-Channel HEXFET® Power MOSFET", Part Number=IRLML0060TRPBF, Pin Count=3, PressFit=No, Sense=No, SMD=Yes, Socket=No
TR1: library part XFMR_BLOCK_FL6/6, "Transformer 2xPrim 2xSec Type1", Manufacturer="BLOCK TRANSFORMATOREN ELEKTRONIK", Manufacturer Part Number=FL6/6, Author="CERN DEM JLC", ComponentHeight=22.6mm, Component Type=Standard, CreateDate=04/06/2015, HelpURL=\\cern.ch\dfs\Applications\Altium\Datasheets\XFMR_BLOCK_FL6-6.pdf, LatestRevisionDate=04/06/2015, Mounted=Yes, Part Description="6VA Low Profile Transformer Type FL", Part Number=XFMR_BLOCK_FL6/6, Pin Count=8, Sense=No, SMD=No, Socket=No, Status=None

## Via types
v1: diameter 39.37, hole 19.68, Top Layer to Bottom Layer, 34 vias
v2: diameter 39.37, hole 19.68, Top Layer to Bottom Layer, tented both sides, 2 vias

## Nets (pads, with @x,y where several pads share a name; then routed paths per layer and width w, separated by ;. In a path a pad name is that pad's centre, name@x,y a point inside that pad or via, vN(x,y) a via of type N, cw(c..) or ccw(c..) an arc to the next point about the centre after c; other vN are vias at no path point)
+5V3: C3.1 D2.2 IC1.3 R1.2 R12.1 | length 1651
  Top Layer w15.75: D2.2 1874,2873 v2(1876,2871) ; v2(2240,2871) R12.1
  Top Layer w39.37: R1.2 1533,3686 1575,3644 IC1.3
  Top Layer w59.06: C3.1 1765,3070 1875,2960 D2.2@1875,2935.99
  Top Layer w78.74: IC1.3 1703.09,3252.91 C3.1
  Bottom Layer w15.75: v2(1876,2871) v2(2240,2871)
+7V: C6.1 D3.2 IC2.3 R3.2 R10.1 | length 1047.9
  Top Layer w59.06: R3.2@1298,3043 1329,3043 IC2.3@1498,2874 ; IC2.3 1715.09,2643.91 C6.1 1800,2480 1855,2425 D3.2 1856,2262 R10.1@1856,2151
+VCAP: C10.2 C11.2 C12.1 C13.2 IC3.6 IC3.9 L1.1 R8.2 R9.2 R17.1 T1.2 | length 3683.2
  Top Layer w15.75: IC3.6 2111.39,2615.61 2165,2562 L1.1 ; IC3.9 2177.17,3059.17 2195,3077 2341,3077 2397,3021 R17.1@2397,2809
  Top Layer w39.37: T1.2 2031.4,2023.6 2066,1989 2189,1989 2210,1968 R8.2 2212.94,1924.43 C13.2 2498.43,1924.43 2501,1927 ; L1.1 2297.54,2591 C11.2 C10.2 2378.57,2756.57 2397,2775 R17.1 R17.1@2397,2809 ; R9.2 2313.64,1002.27 C12.1
  Top Layer w78.74: L1.1 2268.54,2469.46 2320,2418 2448,2418 2501,2365 2501,1927 2501,1496 2402,1397 C12.1
GND: B1.1 B2.1 B3.1 B4.1 C1.2 C2.2 C3.2 C4.1 C5.2 C6.2 C7.1 C8.1 C9.2 C10.1 C11.1 C13.1 C14.2 D1.3 IC3.3 IC3.4 IC3.5 IC3.11 IC3.17 IC4.3 J1.4 J1.5 J2.2 R2.1 R4.1 R13.1 R14.1 R15.1 R16.1 R18.2 | length 5419.4
  Top Layer w15.75: IC3.3 2034.61,2887.61 ; IC3.4 2060.2,2878.8 ; IC3.5 2085.8,2880.2 ; IC3.17@2111.39,2983.39 IC3.11 2111.39,3115.39 2136,3140 2217,3140 2236,3159 R13.1
  Top Layer w19.68: IC3.17@2111.39,2983.39 IC3.17 2117,2945 2211,3039 2310,3039 2341,3008 R16.1 ; v1(2238,2743) R18.2@2238,2799.63
  Top Layer w39.37: R2.1@995.57,3556 996,3555.57 v1(996,3494) 996,3425.43 C4.1 995.57,3345.43 1031,3310 C2.2 ; C7.1 1002.63,2829.06 1004,2827.69 v1(1004,2773) 1004,2713.37 R4.1 1002.63,2605.46 C5.2 ; C8.1 1826,3353.57 v1(1826,3302) 1826,3227.46 C9.2 ; IC4.3 1996.72,1938.28 2008.63,1926.37 v1(2029,1926.37) R14.1 ; v1(2002,978) 2002,979 R15.1 ; v1(2059,2709) v1(2059,2760) 2059,2863 ; C10.1 v1(2449.43,2644) C11.1 v1(2510,2591)
  Top Layer w59.06: v1(2329,1740) v1(2329,1794) C13.1
  Top Layer w78.74: v1(1473,3070) v1(1518,3070) C3.2 ; v1(1477,2480) v1(1524,2480) C6.2
  Bottom Layer w78.74: B1.1 224.43,98.43 524,398 879,398 ; J2.2@853.5,110 853.5,372.5 879,398 ; B3.1 1663,98 1363,398 879,398
  other v1: 1002,2633 213,2938 273,2938 329,2938 155,2939 214,2992 155,2993 272,2993 327,2993 271,3044 156,3045 214,3045 327,3045 275,3247 327,3247 162,3248 219,3248 995,3361
NetC1_1: C1.1 C2.1 C5.1 F1.2 IC1.2 IC2.2 | length 1715
  Top Layer w78.74: 1193.11,3260 1193.11,3210.11 1139.91,3156.91 C2.1 1030.91,3157 C1.1 765.53,2902.47 891.68,2776.32 F1.2 891.68,2498.32 942.09,2447.91 C5.1 1151.91,2447.91 1208.11,2504.11 1208.11,2648
NetC4_2: C4.2 IC1.1 R1.1 R2.2 | length 448.4
  Top Layer w39.37: C4.2 1070.74,3429.31 1070.74,3481 ; R2.2@1070.74,3544 1070.74,3481 ; R1.1 1193.63,3481.52 IC1.1 1070.74,3481
NetC7_2: C7.2 IC2.1 R3.1 R4.2 | length 488.3
  Top Layer w39.37: C7.2 1081.37,2829.06 1081.37,2779 ; R4.2 1081.37,2779 ; R3.1 1207.63,2869.48 IC2.1 1208.11,2822.11 1165,2779 1081.37,2779
NetC12_2: C12.2 C14.1 R9.1 R15.2 | length 1611.7
  Top Layer w39.37: C12.2 2092,1397 2140.37,1348.63 R15.2 R9.1
  Top Layer w78.74: C14.1 1977,560 1867,670 1867,1321 1943,1397 C12.2
NetD1_1: D1.1 F1.1 | length 419.5
  Top Layer w78.74: D1.1 341,2476 434,2569 F1.1@715,2569
NetD1_2: D1.2 TR1.6 TR1.8 | length 2329
  Top Layer w78.74: D1.2@334,2669 245,2669 199,2623 199,2443 299,2343 299,2213 214.15,2128.15 214.15,1928.85 342,1801 1288,1801 1395.25,1908.25 TR1.6@1395.25,2034
NetD1_4: D1.4 TR1.5 TR1.7 | length 1795.6
  Top Layer w78.74: TR1.7 TR1.7@411,2034 ; D1.4 541,2258 411,2128 TR1.7@411,2034 ; TR1.5@1590,2031 1590,2067 1496,2161 1256,2161 1129,2034 TR1.7@411,2034
NetD3_1: D3.1 R5.1 R7.1 | length 345.4
  Top Layer w39.37: D3.1 2061,2263 2091.05,2293.05 R5.1 R7.1
NetIC3_1: IC3.1 IC3.2 L1.2 | length 101.2
  Top Layer w17.72: 1983.43,2784.43 IC3.1 ; 2009.02,2783.98 IC3.2
  Top Layer w27.56: IC3.1@1992,2830.83 2000,2830.83
NetIC3_7: IC3.7 R12.2 R16.2 | length 355
  Top Layer w15.75: IC3.7 2136.98,2873.98 2179,2916 2179,2960 2211.37,2992.37 R12.2
  Top Layer w19.68: R12.2 2319.74,2912.63 R16.2
NetIC3_10: IC3.10 R11.1 | length 282.5
  Top Layer w15.75: IC3.10 2136.98,3096 2151.98,3111 2275,3111 2330,3166 R11.1
NetIC3_12: IC3.12 R6.1 R11.2 R13.2 | length 374.9
  Top Layer w11.81: IC3.12 2085.8,3134.43 R6.1 2219.74,3268.37 R13.2 R11.2
NetIC4_1: IC4.1 R10.2 T1.1 | length 325.8
  Top Layer w39.37: IC4.1@1902,1847.72 1885.28,1847.72 1856,1877 R10.2 1941.91,2058.63 1942,2058.72
NetIC4_2: IC4.2 R8.1 R14.2 | length 218
  Top Layer w39.37: IC4.2@1992.43,1847.63 R14.2 2095,1848.63 R8.1
NetJ2_1: J2.1 TR1.1 | length 864.2
  Top Layer w78.74: TR1.1 345,524.94 345,250 487,108 J2.1@690.01,108
NetJ2_3: J2.3 TR1.4 | length 966.3
  Top Layer w78.74: J2.3@1015.5,110 1015.5,223.5 1095,303 1366,303 1456,393 1456,559 1553.05,656.05 TR1.4
NetR5_2: R5.2 R7.2 T1.3 | length 442.8
  Top Layer w39.37: T1.3@2003,2149.28 2145.72,2149.28 2174,2121 R5.2 R7.2
NetTR1_2: TR1.2 TR1.3 | length 590.6
  Top Layer w78.74: TR1.2@606.85,655.05 TR1.3@1197.4,655.05
SYNC: IC3.8 R17.2 R18.1 | length 360.4
  Top Layer w15.75: IC3.8 2162.57,2733.43 2200,2696 2294,2696 2318.37,2720.37 R18.1
VOUT: C8.2 C9.1 D2.1 IC3.13 IC3.14 IC3.15 J1.1 R6.2 | length 387.7
  Top Layer w17.72: IC3.15 2009.02,3109.98 ; IC3.14 2034.61,3097.61 ; IC3.13 2060.2,3105.31
  Top Layer w30.71: 2019,3059.17 IC3.14 2050,3059.17
  Top Layer w39.37: C8.2 1957.05,3427.43 1990,3394.49 1990,3393 ; C9.1@2009.02,3218.97 2000.99,3227 C9.1 ; J1.1@2053.24,3348.24 J1.1@2053.24,3358.63
pads on no net: IC3.16 J1.2 J1.3 J2.4 TR1.9 TR1.10 TR1.11 TR1.12

## Polygon pours and split planes (outlines as drawn)
GND on Top Layer "GND" (hatched 90Degree grid 10 track 10, pour order 12): 608,2632 634,2658 634,2905 515,3024 515,3244 472,3287 71,3287 14,3230 14,2844 91,2767 416,2767 460,2723 460,2650 478,2632
VOUT on Top Layer "VOUT" (hatched 90Degree grid 10 track 10, pour order 10): 1968,3103 2068,3103 2068,3217 2100,3249 2169,3249 2169,3287 2122,3287 2108,3301 2108,3414 2094,3428 1992,3428 1972,3408 1972,3154 1938,3120 1836,3120 1836,3080 1945,3080
GND on Top Layer "PGND" (hatched 90Degree grid 10 track 10, pour order 6): 2029,2872 2092,2872 2092,2891 2126,2891 2126,2998 2019,2998 2019,2891 2029,2881
NetIC3_1 on Top Layer "IN_BOOST" (hatched 90Degree grid 10 track 10, pour order 4): 1922,2499 2001,2499 2001,2697 2013,2709 2013,2790 1974,2790 1922,2738
GND on Bottom Layer "GND" (hatched 90Degree grid 10 track 10, remove dead copper, pour order 2): 0,3740 2559,3740 2559,0 2140,0 2140,850 0,850

## Keep-outs
Keep-Out Layer:
  lines w7.87: 0,2559.06 0,3740 0,0 2559.06,0 2559.06,3739.94 2558.84,3740.16 0,3740.16

## Silkscreen, mask and mechanical layers (free items; w line width, h text height)
Top Overlay:
  text "Supercaps UPS" at 221,3648 h60
  text "Luca Daidone" at 229,3576 h39.37
  text "e" at 894,2848 h314.96
  text "PWR Mode" at 2265,2842 h19.68
  text "PSM" at 2209,2780 h19.68 r90
  text "PWM" at 2450,2776 h19.68 r90
  text "100F 2.7V" at 1895,1506 h60
  text "100F 2.7V" at 1899,661 h60
  text "N" at 421,85 h60
  text "PH" at 1301,81 h60
  text "H" at 1469,7 h314.96

## Dimensions
0,0 to 0,3740.16 on Mechanical 14
0,3740.16 to 2559.06,3740.16 on Mechanical 14

## Text inside footprints (layer, text, board x,y; h text height)
D1: Top Overlay "-" at 484.5,2707.58 h78.74 r180; Top Overlay "+" at 444.94,2501.28 h70.87 r180; Mechanical 14 "-" at 484.5,2707.58 h78.74 r180; Mechanical 14 "+" at 444.94,2501.28 h70.87 r180
J2: Top Overlay "2" at 865.01,-41.97 h40 r90; Top Overlay "1" at 705.01,-35 h40 r90; Top Overlay "3" at 1030.99,-42.87 h40 r90; Mechanical 14 "2" at 865.01,-41.97 h40 r90; Mechanical 14 "1" at 705.01,-35 h40 r90; Mechanical 14 "3" at 1030.99,-42.87 h40 r90
TR1: Top Overlay "SEC1" at 391.06,1935.57 h59.06 r180; Top Overlay "SEC2" at 1599.72,1935.57 h59.06 r180; Top Overlay "PR2" at 1466.85,687.54 h59.06 r180; Top Overlay "PR1" at 481.61,687.54 h59.06 r180; Mechanical 14 "SEC1" at 391.06,1935.57 h59.06 r180; Mechanical 14 "SEC2" at 1599.72,1935.57 h59.06 r180; Mechanical 14 "PR2" at 1466.85,687.54 h59.06 r180; Mechanical 14 "PR1" at 481.61,687.54 h59.06 r180